# Altium PCB T1_MODIFYV1_0527.PCBDOC (part 6 of 6)
Units mm, origin at the board's own origin, x right, y up, seen from the top; angles counter-clockwise.
Board outline 1320.8 x 844.04 mm, 2 copper layers (Top Layer, Bottom Layer); 219 components, 215 nets, 1393 pads, 492 vias.
Unrouted connection lines stored in the file: 60.
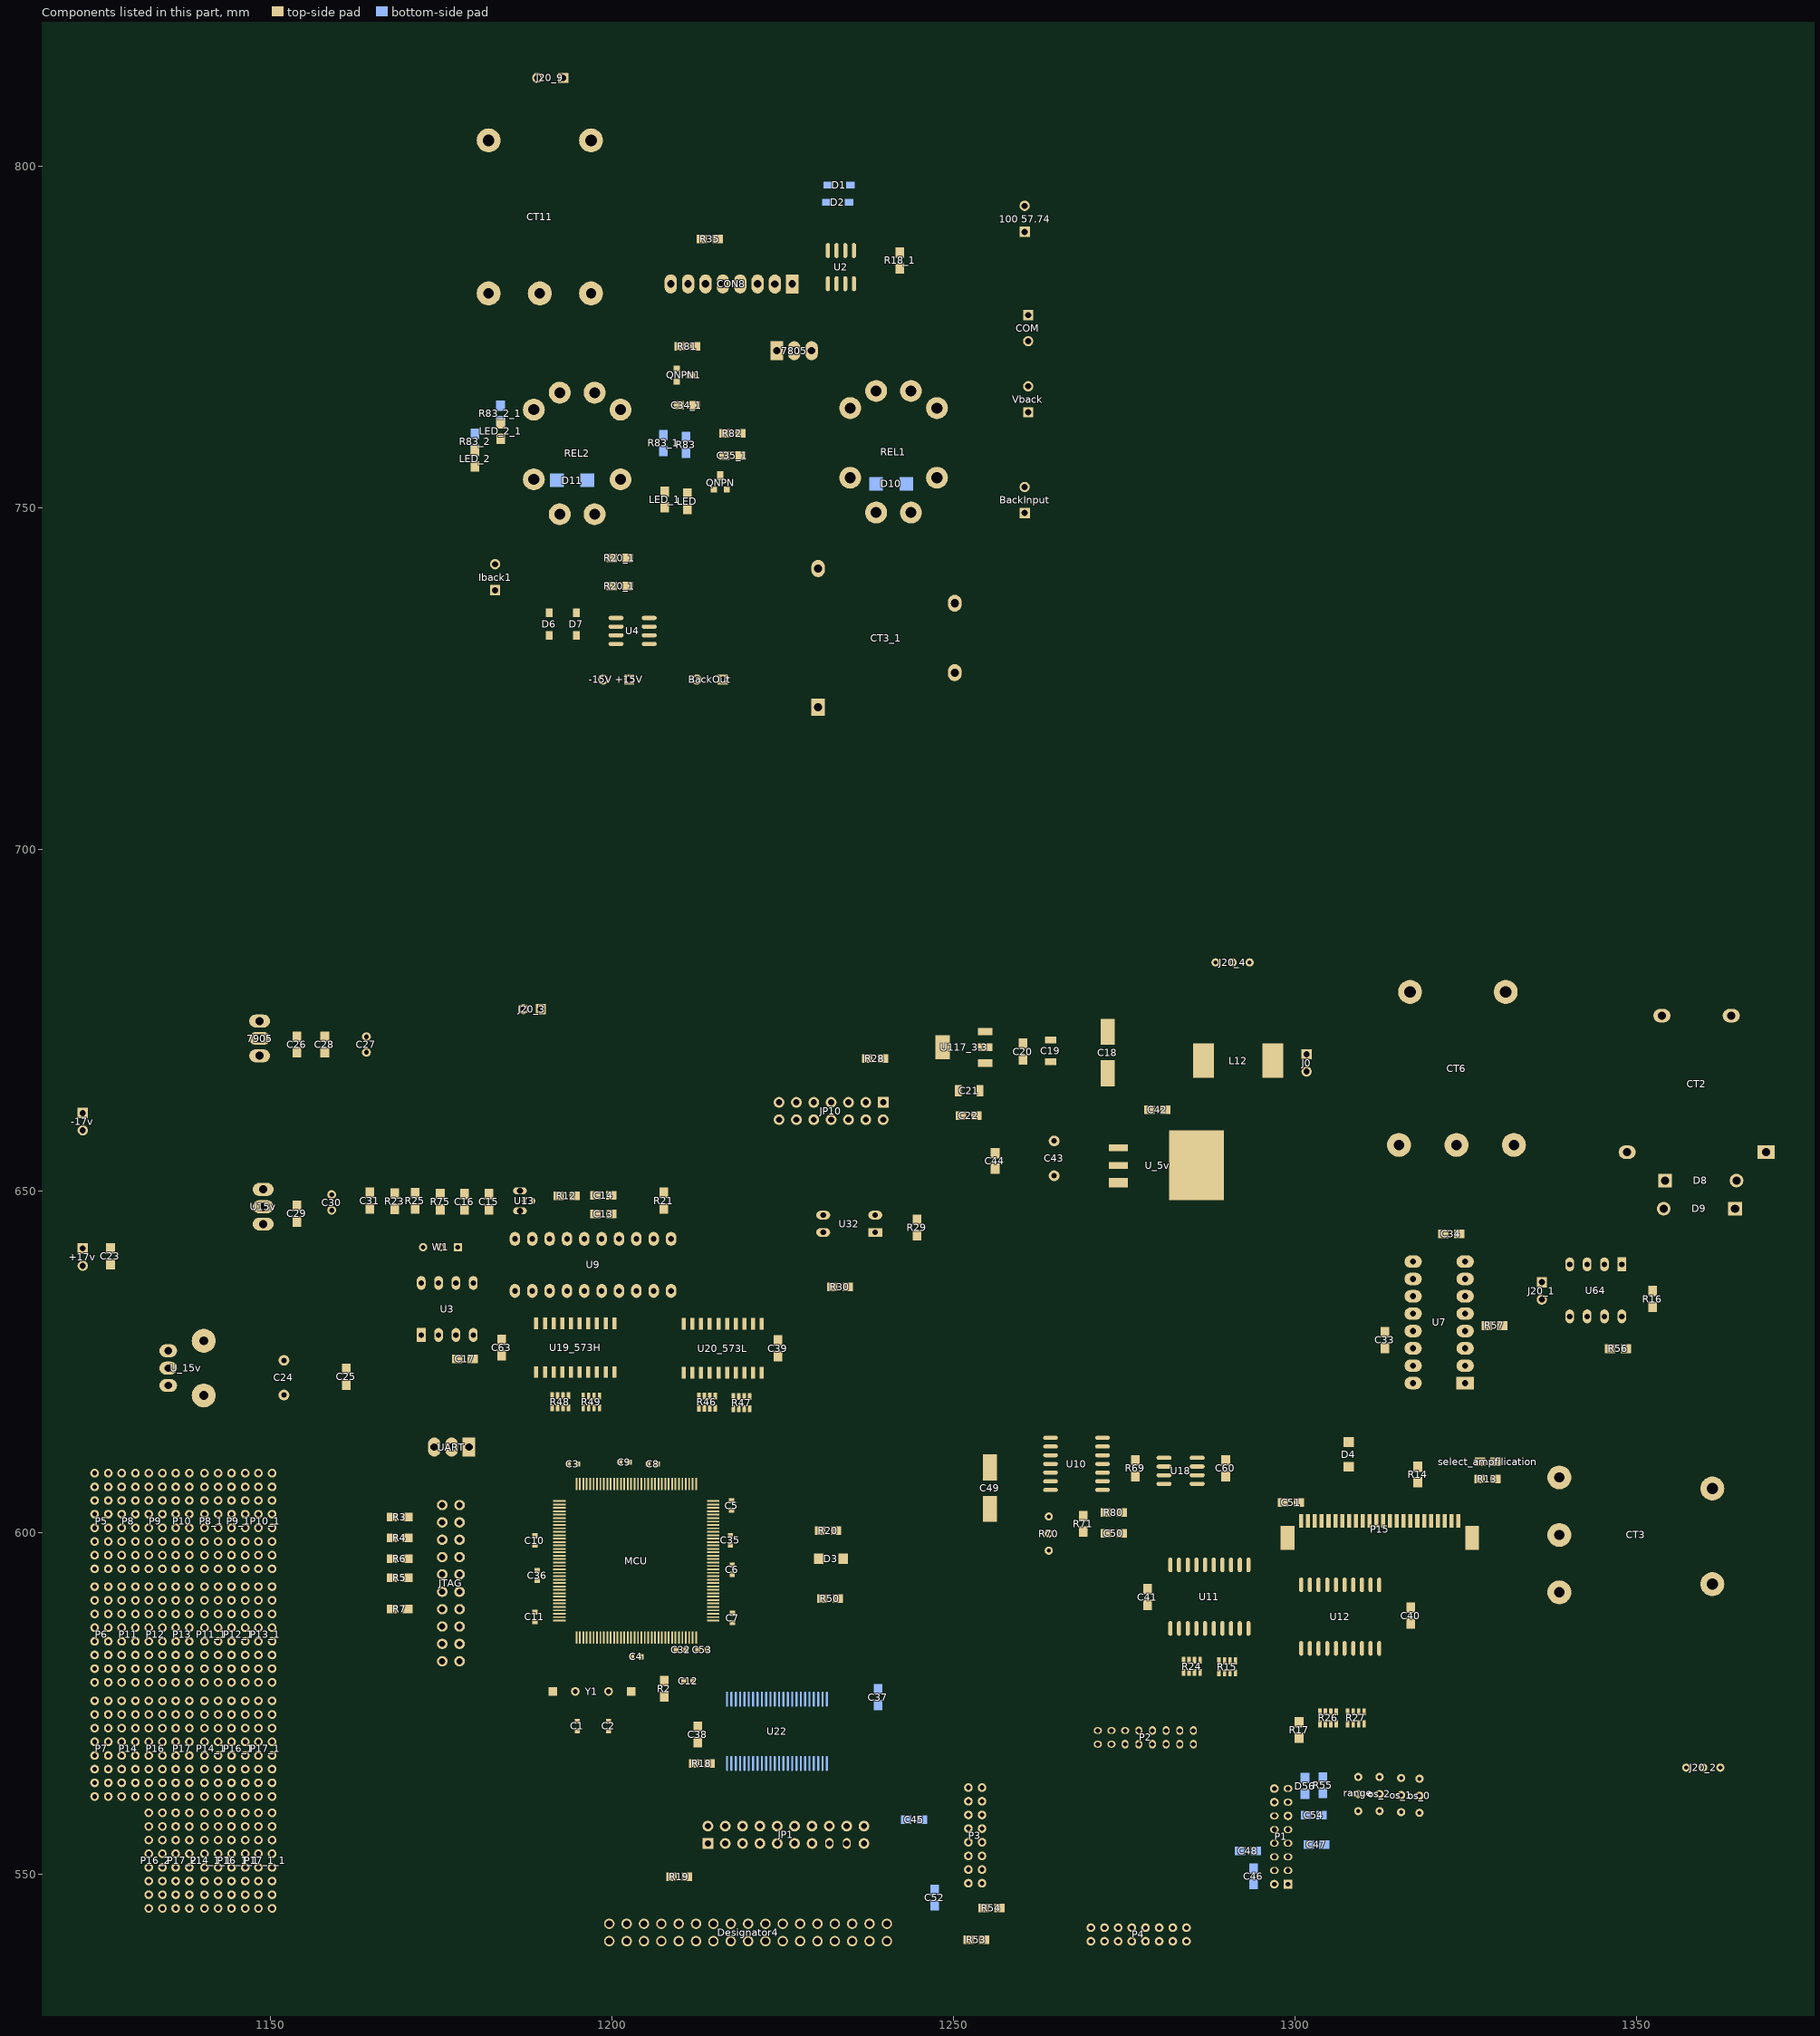
[diagram p6: the components of this part, seen from the top]

## Via types
v1: diameter 0.5, hole 0.3, Top Layer to Bottom Layer, 470 vias
v2: diameter 0.8, hole 0.5, Top Layer to Bottom Layer, 12 vias
v3: diameter 3, hole 1.5, Top Layer to Bottom Layer, 4 vias
v4: diameter 3, hole 3, Top Layer to Bottom Layer, 4 vias
v5: diameter 1, hole 0.7, Top Layer to Bottom Layer, 2 vias

## Nets (pads, with @x,y where several pads share a name; then routed paths per layer and width w, separated by ;. In a path a pad name is that pad's centre, name@x,y a point inside that pad or via, vN(x,y) a via of type N, cw(c..) or ccw(c..) an arc to the next point about the centre after c; other vN are vias at no path point) (continued)
copper on no net: | length 4902.3
  Top Layer w0.2: v1@1187.729,602.132 1189.533,602.132 1191.057,603.656 1191.641,603.656 ; v1(1187.806,601.066) 1187.907,601.167 1189.38,601.167 1191.336,603.123 ; 1188.292,754.154 1197.032,754.154 1205.812,762.934 1210.552,762.934 1210.932,763.314 1210.932,769.174 ; v1@1195.807,610.884 1195.807,609.498 1195.807,609.397 1196.137,609.067 1196.772,608.432 1196.772,608 ; v1(1196.721,610.692) 1196.797,610.489 1196.797,609.016 1197.229,608.584 1197.229,607.822 ; 1198.753,607.314 1198.753,609.981 1198.88,610.108 v1(1198.88,611.429) ; 1199.312,607.873 v1@1199.312,608.863 ; 1199.711,732.665 1199.762,732.665 ; v1@1199.769,605.409 1199.769,606.45 ; 1200.252,605.358 v1(1200.277,604.545) 1200.277,605.333 1200.277,606.476 ; 1201.487,731.264 1202.112,731.264 1202.362,731.514 1202.362,735.039 1201.207,736.194 1187.292,736.194 1186.862,735.764 1186.862,720.639 1188.962,718.539 1233.012,718.539 1233.287,718.814 1233.562,719.089 1233.562,724.364 1233.312,724.614 1226.912,724.614 ; v1(1205.763,578.409) 1205.763,583.895 ; v1(1206.271,577.672) 1206.271,584.124 ; 1210.288,584.66 cw(c1210.767,584.383) 1210.767,584.937 1210.285,584.937 cw(c1210.285,584.421) 1210.741,584.661 ; 1212.799,585.724 1213.815,584.708 ; 1215.263,601.675 1215.796,601.675 1216.558,601.675 v1@1216.762,601.472 ; 1215.517,601.116 1215.873,601.116 1216.177,600.812 v1(1217.066,600.786) ; 1215.517,602.183 v1@1217.447,602.183 ; 1215.542,602.615 1216.228,602.615 v1(1218.311,602.666) ; 1217.492,762.434 1217.612,762.314 1217.612,758.814 1218.437,757.989 ; v1(1239.291,600.507) v1(1243.33,596.468) ; v1(1240.003,601.167) v1(1243.914,597.332) ; v1(1240.815,601.751) v1(1245.159,597.256) ; v1(1241.577,602.463) v1(1244.854,598.907) ; v1(1246.251,593.852) 1246.208,589.958 1247.369,588.797 1251.814,588.797 ; v1(1246.708,594.538) 1246.937,594.309 1246.937,590.474 1247.699,589.712 1252.449,589.712 ; v1(1248.318,594.967) 1249.223,594.741 1252.245,591.718 ; v1(1248.943,595.681) 1249.096,595.478 1259.878,584.695 ; 1257.712,795.589 1261.637,795.589 ; 1257.737,795.589 1257.937,795.589 ; 1258.037,795.389 1259.512,795.389 1259.937,795.814 1258.187,795.814 ; 1258.937,795.714 1259.462,795.714 1259.487,795.689 1259.562,795.689 1259.462,795.589 1259.337,795.589 1259.212,795.714 1259.287,795.639 1258.737,795.639 1258.587,795.789 1258.537,795.789 1258.537,795.614 1258.412,795.739 1258.412,795.589 1258.637,795.589 1258.712,795.664 1258.712,795.589 1258.837,795.714 1258.837,795.814 1259.062,795.589 1260.287,795.589
  Top Layer w0.254: v1(1157.859,618.82) 1157.859,557.606 1180.77,534.695 1245.845,534.695 v1(1251.814,540.664) ; 1170.508,579.018 1170.508,566.801 1199.312,537.997 1211.936,537.997 1212.164,538.226 1212.164,540.08 ; 1175.92,611.532 cw(c1174.576,610.188) 1176.477,610.188 cw(c1178.378,610.188) 1177.034,611.532 ; 1176.1,611.712 cw(c1175.189,610.801) 1176.477,610.801 cw(c1177.765,610.801) 1176.854,611.712 ; 1176.477,612.572 1176.477,608.889 v1(1178.662,606.704) ; v1(1182.167,618.185) 1182.167,613.969 1183.157,612.978 v1(1199.21,612.978) ; v1(1187.298,611.861) 1187.298,609.727 1188.91,608.114 v1(1188.91,607.987) ; v1(1187.298,614.223) 1187.298,616.179 1189.304,618.185 1191.057,618.185 ; v1@1187.729,602.132 v1(1187.882,602.107) ; v1(1188.415,611.784) 1188.415,610.337 1190.625,608.127 v1(1190.65,608.127) ; v1(1188.415,613.893) 1188.415,615.213 1190.219,617.017 1191.59,617.017 1191.984,617.41 1191.984,618.312 ; v1@1188.824,608.2 cw(c1188.611,607.987) v1@1188.913,607.987 ; v1(1189.533,614.375) 1189.533,615.036 1190.93,616.433 1192.428,616.433 1192.86,616.864 1192.86,618.236 1192.784,618.312 ; 1190.59,618.185 cw(c1190.59,617.468) 1191.097,617.975 ; 1191.438,603.148 1191.59,603.148 ; 1191.819,562.839 1191.819,553.517 1192.251,553.085 1192.276,553.085 1202.258,543.103 1202.258,543.027 ; 1191.897,617.975 cw(c1191.687,617.765) 1191.984,617.765 cw(c1192.281,617.765) 1192.071,617.975 ; 1192.682,562.635 1192.682,555.32 1200.023,547.98 1200.099,547.98 1203.401,544.678 1203.401,541.782 1202.106,540.487 1202.106,540.258 ; 1192.697,617.975 cw(c1192.302,617.581) 1192.86,617.581 ; v1(1197.432,611.2) 1197.432,609.422 1197.762,609.092 1197.762,607.746 ; 1198.27,607.695 v1(1198.27,610.591) ; 1200.698,544.663 cw(c1198.834,542.798) 1201.471,542.798 ; 1201.132,544.229 cw(c1199.701,542.798) 1201.725,542.798 ; 1201.566,543.795 cw(c1200.568,542.798) 1201.979,542.798 ; 1201.802,543.559 ccw(c1202.106,543.862) 1202.106,543.433 ; 1202.106,540.893 ccw(c1202.106,541.874) 1202.8,541.18 ; 1202.487,540.258 cw(c1203.959,540.258) 1202.918,541.299 ; 1202.741,540.258 cw(c1204.826,540.258) 1203.351,541.732 ; 1202.741,607.543 1202.741,608.228 1203.325,608.813 1204.265,609.752 v1(1204.265,611.175) ; 1203.274,606.45 1203.274,603.529 1204.316,602.488 v1(1209.396,602.488) ; 1204.227,623.913 1204.824,624.51 v1(1208.481,624.51) ; v1(1204.265,616.839) 1204.265,623.875 ; 1206.737,543.247 ccw(c1205.653,544.331) 1207.186,544.331 ccw(c1208.719,544.331) 1207.635,543.247 ; 1206.841,548.498 cw(c1208.532,546.807) 1208.532,549.199 ; 1206.916,543.067 ccw(c1206.266,543.718) 1207.186,543.718 ccw(c1208.106,543.718) 1207.455,543.067 ; 1207.186,542.798 1207.186,545.846 1210.818,549.478 1210.793,549.478 ; 1207.275,548.932 cw(c1208.532,547.674) 1208.532,549.453 ; 1207.541,540.131 1206.703,540.131 1205.941,540.893 1205.941,547.599 1207.846,549.504 ; 1207.605,549.262 cw(c1207.938,548.93) 1208.223,549.303 ; 1207.708,549.366 cw(c1208.532,548.542) 1208.532,549.707 ; 1207.81,549.467 cw(c1208.115,549.162) 1208.378,549.505 ; 1208.155,549.366 ccw(c1207.846,549.088) 1207.846,549.504 ; 1208.735,549.504 1207.846,549.504 ; 1209.383,583.095 1209.751,583.463 ; 1209.626,582.956 cw(c1210.109,583.105) 1209.751,583.463 ; 1209.751,584.784 1209.751,583.463 ; 1209.789,548.449 ccw(c1208.532,549.707) 1210.31,549.707 ; 1210.223,548.883 ccw(c1209.399,549.707) 1210.564,549.707 ; 1210.259,583.87 1210.259,583.387 1210.767,582.879 1212.19,582.879 1212.217,582.906 1212.507,582.906 ; 1210.341,549.001 cw(c1210.818,548.524) 1210.818,549.199 ; 1210.513,582.879 ccw(c1209.9,582.879) 1210.334,583.313 ccw(c1210.767,583.746) 1210.767,583.133 ; 1210.947,582.7 cw(c1211.38,582.266) 1211.38,582.879 cw(c1211.38,583.492) 1210.947,583.059 ; 1211.817,539.809 cw(c1210.978,538.97) 1212.164,538.97 ; 1211.829,582.879 ccw(c1211.829,583.585) 1212.327,583.086 ; 1211.959,582.879 cw(c1211.959,582.358) 1212.327,582.727 ; 1212.164,538.48 cw(c1214.044,538.48) 1212.715,539.809 ; 1212.164,539.093 cw(c1213.431,539.093) 1212.535,539.989 ; 1213.712,583.084 ccw(c1213.462,583.334) 1213.815,583.334 ; 1213.815,583.209 1213.815,584.708 ; 1213.815,583.702 ccw(c1214.689,583.702) 1214.071,583.084 ; v1(1220.673,611.48) 1232.408,611.48 1241.171,620.243 v1(1265.631,620.243) ; 1230.884,643.992 1230.884,637.337 1232.205,636.016 ; v1(1231.9,632.358) 1232.408,632.866 1232.408,635.965 ; 1234.415,636.143 1251.255,636.143 ; 1238.504,643.992 1238.733,643.763 1244.371,643.763 ; v1(1245.997,633.679) v1(1261.923,633.679) ; 1250.438,539.289 cw(c1252.042,537.684) 1252.042,539.953 ; 1250.871,539.722 cw(c1252.042,538.552) 1252.042,540.207 ; 1251.305,540.156 cw(c1252.042,539.419) 1252.042,540.461 ; v1(1286.231,625.018) 1291.006,625.018 1303.934,612.089 v1(1303.934,608.762) ; v1(1297.534,620.243) 1297.584,620.243 1305.23,612.597 ; 1301.547,666.411 1301.547,623.443 1308.202,616.788 1308.202,613.359 ; 1305.23,612.673 1305.23,612.597 ; 1318.489,609.702 1306.119,609.702 1305.23,610.591 1305.23,612.597
  Top Layer w0.3: 1180.389,789.364 1212.737,789.364 1212.987,789.114 ; 1180.462,780.814 1180.462,784.664 ; v1(1183.615,765.099) 1183.615,771.804 v1(1187.374,775.564) ; v1(1196.137,745.236) 1196.137,747.846 1197.362,749.071 ; 1198.692,724.739 1198.692,729.044 1199.912,730.264 ; 1201.392,754.314 1201.392,755.8 1207.326,761.734 1211.892,761.734 1212.492,762.334 1212.492,764.914 ; v1(1201.471,746.1) 1201.471,754.235 ; 1202.532,738.594 1207.332,738.594 1207.972,737.954 1207.972,731.754 1207.613,731.395 1205.405,731.395 ; 1204.692,724.214 1203.192,725.714 1203.192,732.314 1203.572,732.694 1205.052,732.694 ; 1209.457,764.799 1209.457,768.542 ; 1209.572,770.562 1209.572,773.634 ; 1212.492,762.534 1217.392,762.534 1217.492,762.434 ; 1214.854,752.731 1213.67,752.731 1213.137,753.264 1213.137,760.689 1213.587,761.139 1216.037,761.139 ; 1215.426,789.434 1215.517,789.434 1216.188,788.763 1216.188,782.83 ; 1215.872,754.974 1215.956,754.89 1234.74,754.89 ; 1218.337,757.734 v1(1241.092,757.734) ; 1218.728,760.986 v1(1218.728,773.93) ; v1(1220.699,765.15) 1228.852,765.15 1229.436,765.734 1229.436,772.795 ; 1221.833,790.335 1230.415,790.335 1230.429,790.321 1231.24,790.321 1231.57,789.991 1231.57,788.264 ; 1223.637,784.682 1223.637,785.004 1224.153,785.52 1233.856,785.52 1234.135,785.241 1234.135,783.26 ; 1231.925,779.464 1232.168,779.464 1232.84,780.136 1232.84,782.867 ; 1232.832,787.459 1232.832,789.432 ; 1232.84,780.898 1241.984,780.898 1242.314,781.228 1242.314,785.165 ; 1233.562,751.764 1242.822,751.764 1243.912,752.854 1243.912,761.562 1247.44,765.09 ; 1234.11,787.717 1234.11,793.013 1234.11,793.166 1234.567,793.623 ; 1234.11,791.362 1241.374,791.362 1242.096,790.641 1242.096,787.402 ; 1236.912,746.814 1236.912,747.174
  Top Layer w0.5: 1175.817,756.031 1179.728,756.031 ; v2(1187.137,744.398) 1224.621,744.398 v2(1224.887,744.664) ; 1187.812,764.934 1187.812,770.154 1194.852,777.194 1253.572,777.194 1254.172,777.794 1254.172,791.434 1254.162,791.374 1254.162,794.714 1255.037,795.589 1258.152,795.589 ; 1188.116,770.349 1188.116,769.809 ; 1188.272,765.374 1188.272,769.654 1188.116,769.809 ; 1190.788,731.395 1190.788,721.913 1191.487,721.214 1225.932,721.214 1225.952,721.234 1225.892,721.234 1227.212,722.554 1227.212,740.014 ; 1190.788,734.697 1189.175,734.697 1188.312,733.834 1188.312,721.114 1189.812,719.614 1224.892,719.614 ; 1192.052,767.014 1192.052,767.374 1200.332,775.654 1254.912,775.654 1255.912,776.654 1255.912,787.634 1257.031,788.753 1260.351,788.753 1260.512,788.914 ; 1192.132,768.174 1192.512,768.174 1200.112,775.774 1200.232,775.654 1205.112,775.654 ; 1193.532,731.395 1193.553,731.374 1199.672,731.374 ; 1194.212,734.697 1196.529,734.697 1198.561,732.665 1200.555,732.665 ; 1195.292,777.194 1188.116,770.018 1188.116,769.809 ; 1196.992,767.014 1196.992,764.834 1196.992,762.514 1195.792,761.314 1188.972,761.314 1179.912,752.254 1179.912,739.094 1180.592,738.414 1200.192,738.414 ; 1200.192,742.914 1199.852,742.574 1183.372,742.574 1182.552,743.394 1182.552,752.074 1190.592,760.114 1199.732,760.114 1200.912,761.294 1200.912,765.034 ; 1206.752,738.594 1206.752,741.874 1207.772,742.894 1226.484,742.894 1227.012,743.421 1227.012,745.214 1231.652,749.854 1233.562,751.764 ; 1207.541,752.881 v1(1207.541,758.139) ; 1207.694,749.757 1207.694,748.614 1208.354,747.954 1218.336,747.954 1219.632,749.249 v1(1219.632,751.713) ; 1210.894,750.113 1211.25,749.757 1216.228,749.757 1216.887,750.416 v1(1216.887,752.414) ; 1210.894,752.627 v1(1210.894,757.885) ; 1211.212,782.639 1211.212,779.139 v1(1212.212,778.139) ; 1213.512,782.514 1213.512,779.389 1214.571,778.33 v1(1218.728,778.33) v1@1218.671,778.33 ; 1218.728,782.83 1218.728,780.498 1219.762,779.464 1231.925,779.464 ; 1221.287,783.164 1221.287,789.789 1221.833,790.335 ; 1223.637,784.835 1223.637,782.981 1223.808,782.81 ; 1224.712,719.614 1228.612,719.614 1229.852,720.854 ; 1225.652,721.414 1226.912,722.674 ; 1226.812,740.014 1226.812,740.694 1227.292,741.174 1230.145,741.174 ; 1226.912,723.214 1226.912,722.674 ; 1230.092,740.814 1227.452,740.814 1227.212,740.574 1227.212,740.014 ; v1(1231.798,794.588) 1232.832,793.555 1232.832,789.102 ; v1@1236.878,641.071 1238.885,639.064 v1(1253.592,639.064) ; 1242.096,784.658 1242.096,785.116 ; 1243.727,767.184 1261.952,767.184 ; 1244.252,767.534 1261.632,767.534 1261.952,767.214 ; 1255.032,775.954 1255.292,776.214 1255.912,776.834 ; 1260.392,767.934 1244.252,767.934 1260.632,767.934 ; v1(1305.103,639.267) 1305.103,653.415 1308.202,656.514 1315.669,656.514 ; 1226.912,722.674 1226.912,726.714 1226.912,739.714 1227.212,740.014
  Top Layer w1: 1190.788,731.395 1195.033,731.395 ; 1190.788,734.697 1194.6,734.697 ; 1197.412,766.174 1197.412,767.082
  Bottom Layer w0.2: 1184.123,745.795 1201.166,745.795 ; 1185.215,615.036 1191.844,615.036 v1@1195.819,611.06 ; 1185.926,602.107 v1(1187.882,602.107) ; v2@1187.137,744.296 1187.475,744.634 ; 1188.312,753.839 1191.737,753.839 ; 1192.251,615.696 1192.606,615.696 1196.721,611.581 v1(1196.721,610.692) ; 1194.537,577.266 1196.391,575.412 1201.09,575.412 ; 1194.562,758.639 1194.762,758.639 ; 1197.087,753.739 1200.662,753.739 1201.145,754.222 ; v1(1198.88,611.429) 1199.007,611.429 1199.21,611.632 v1(1199.21,612.978) ; 1199.515,571.221 1199.515,552.577 1207.186,544.906 1207.186,542.798 1209.726,540.258 1209.726,539.445 1210.31,538.861 1214.78,538.861 1215.009,538.956 1215.009,540.08 ; 1200.861,575.412 1204.671,575.412 1206.271,577.012 v1(1206.271,577.672) ; 1204.873,577.469 1205.763,578.36 v1(1205.763,578.409) ; 1206.718,543.266 ccw(c1205.588,544.396) 1207.186,544.396 ccw(c1208.784,544.396) 1207.654,543.266 ; 1206.859,543.125 ccw(c1206.07,543.913) 1207.186,543.913 ccw(c1208.301,543.913) 1207.512,543.125 ; 1207.186,542.136 cw(c1207.186,540.538) 1208.316,541.668 cw(c1209.446,542.798) 1207.848,542.798 ; 1207.186,542.336 cw(c1207.186,541.221) 1207.974,542.009 cw(c1208.763,542.798) 1207.648,542.798 ; 1209.064,540.258 ccw(c1207.466,540.258) 1208.596,541.388 ccw(c1209.726,542.518) 1209.726,540.92 ; 1209.264,540.258 ccw(c1208.148,540.258) 1208.937,541.047 ccw(c1209.726,541.835) 1209.726,540.72 ; 1209.726,542.136 cw(c1209.726,540.415) 1210.943,541.632 ; 1209.726,542.336 cw(c1209.726,541.098) 1210.601,541.973 ; 1210.188,542.798 ccw(c1211.181,542.798) 1210.479,542.096 ; 1210.388,542.798 ccw(c1211.863,542.798) 1210.82,541.755 ; 1211.1,541.475 cw(c1209.883,540.258) 1211.604,540.258 ; 1211.222,541.352 ccw(c1212.266,542.396) 1212.266,540.92 ; 1211.441,541.133 cw(c1210.566,540.258) 1211.804,540.258 ; 1211.564,541.011 ccw(c1212.266,541.713) 1212.266,540.72 ; 1212.088,540.487 1209.777,542.798 ; 1214.543,539.651 cw(c1214.234,538.94) 1215.009,538.94 ; 1214.622,539.834 cw(c1214.367,539.245) 1215.009,539.245 ; 1215.009,539.15 cw(c1215.913,539.15) 1215.274,539.79 ; v1(1216.584,601.472) 1218.209,601.472 1218.514,601.167 v1(1240.003,601.167) ; v1(1217.066,600.786) 1217.346,600.507 v1(1239.291,600.507) ; 1217.312,724.864 1218.649,726.201 1218.649,726.301 1218.362,726.014 ; 1217.437,724.989 1217.437,725.089 1219.062,726.714 ; v1@1217.447,601.929 1218.292,601.929 1218.914,601.929 1219.225,601.929 1219.403,601.751 v1@1241.044,601.751 ; v1(1218.311,602.666) v1(1241.577,602.463) ; 1218.382,723.764 1218.562,723.944 ; 1218.587,726.239 1218.362,726.014 ; 1219.062,725.844 1219.062,726.714 ; v2@1229.867,744.634 v2(1230.062,744.439) 1230.062,741.639 ; 1234.787,753.489 1238.562,753.489 1238.737,753.664 ; 1243.137,753.664 1247.012,753.664 1247.162,753.814 ; v1(1243.33,596.468) v1(1246.251,593.852) ; v1(1243.914,597.332) v1(1246.708,594.538) ; v1(1244.854,598.907) 1247.496,596.011 v1(1248.943,595.681) ; v1(1245.159,597.256) 1245.207,597.386 1247.394,595.198 v1(1248.318,594.967) ; 1293.089,551.866 1293.089,556.819 ; 1209.777,542.798 1209.726,542.798 1209.777,542.798 ; 1218.362,726.014 1219.062,726.714 ; 1219.062,726.714 1219.307,726.714 1219.062,726.714
  Bottom Layer w0.254: 1123.798,608.559 1126.025,608.559 ; 1124.22,594.754 1126.22,594.754 ; 1124.22,602.754 1126.097,602.754 ; 1124.22,604.754 1126.383,604.754 ; 1124.22,606.754 1126.466,606.754 ; 1124.306,600.558 1126.719,600.558 ; 1124.458,596.849 1126.124,596.849 ; 1124.458,598.576 1126.043,598.576 ; v1(1157.859,618.82) 1157.859,619.633 1162.406,624.18 1188.593,624.18 1192.682,628.269 1192.682,628.929 v1(1192.682,630.701) ; 1173.937,612.572 1173.937,611.937 1174.521,611.353 ; 1174.598,611.276 1176.274,609.6 ; 1175.69,610.184 1176.274,609.6 ; 1179.22,612.013 1181.989,612.013 1185.469,608.533 1185.469,602.564 1185.926,602.107 ; 1179.394,611.712 cw(c1180.121,610.985) 1180.121,612.013 ; 1179.394,612.466 ccw(c1180.489,613.561) 1180.489,612.013 ; 1179.574,611.532 cw(c1180.734,610.372) 1180.734,612.013 ; 1179.574,612.646 ccw(c1181.102,614.174) 1181.102,612.013 ; v1@1182.167,618.236 1159.713,618.236 1158.215,616.737 1158.215,558.19 1181.506,534.899 1239.952,534.899 1240.485,534.899 1240.536,534.924 1241.704,536.092 1241.781,536.194 1241.781,541.477 1240.206,543.052 1240.18,543.052 ; 1185.215,615.036 1165.352,615.036 1162.253,611.937 1162.253,560.299 1184.58,537.972 1234.897,537.972 1236.294,539.369 1236.294,541.172 1235.304,542.163 1235.304,542.976 ; 1185.316,615.696 1192.606,615.696 ; 1185.418,615.696 1163.98,615.696 1161.39,613.105 1161.39,559.511 1183.691,537.21 1236.523,537.21 1237.742,538.429 1237.742,540.512 ; 1185.621,616.483 1193.47,616.483 1197.432,612.521 v1(1197.432,611.2) ; 1185.875,616.483 1162.558,616.483 1160.424,614.35 1160.424,559.232 1183.361,536.296 1238.072,536.296 1238.834,537.058 1238.834,541.376 1237.971,542.239 1237.971,542.747 ; v1(1187.298,611.861) v1(1187.298,614.223) ; v1(1187.806,601.066) 1186.078,601.066 1185.723,601.421 1184.427,602.717 1184.427,607.543 1182.37,609.6 1176.274,609.6 ; v1(1188.415,611.784) v1(1188.415,613.893) ; v1(1188.91,607.987) 1192.006,604.892 1192.031,604.892 1192.663,604.26 1199.942,604.26 v1(1200.277,604.545) ; v1(1189.533,614.375) 1189.533,610.616 1190.879,609.27 1195.578,609.27 1195.934,608.914 1199.058,608.914 1199.083,608.889 v1(1199.337,608.889) ; v1(1190.142,630.701) 1190.142,632.765 1191.057,633.679 v1(1245.997,633.679) ; 1190.219,626.974 1191.311,628.066 ; 1190.219,626.999 1161.771,626.999 1156.716,621.944 1156.716,558.013 1180.567,534.162 1290.041,534.162 1290.879,535 1290.879,550.647 1291.133,550.901 1293.647,550.901 ; v1(1190.65,608.127) 1193.876,604.901 1199.261,604.901 v1(1199.744,605.384) ; 1191.311,628.091 1191.311,630.599 v1(1191.412,630.701) ; 1191.311,630.461 cw(c1191.653,630.461) v1@1191.411,630.702 ; v1(1198.27,610.591) 1198.27,614.223 1195.146,617.347 1186.256,617.347 1161.313,617.347 1159.434,615.467 1159.434,558.571 1182.395,535.61 1239.215,535.61 1240.206,536.6 1240.206,540.258 ; v1(1204.265,611.175) v1@1204.265,616.89 ; 1206.398,548.386 1211.986,542.798 1212.266,542.798 ; v1(1208.481,624.51) 1228.039,624.51 1232.205,628.675 1232.205,632.054 v1(1231.9,632.358) ; v1(1209.396,602.488) 1209.472,602.488 v1(1218.463,611.48) v1(1220.673,611.48) ; 1210.705,544.08 ccw(c1212.266,545.641) 1212.266,543.433 ; 1211.138,543.646 ccw(c1212.266,544.773) 1212.266,543.179 ; 1211.379,543.405 cw(c1210.772,542.798) 1211.631,542.798 ; 1211.572,543.212 ccw(c1212.266,543.906) 1212.266,542.925 ; 1224.255,660.806 1224.255,662.806 ; 1226.947,660.864 1226.947,662.457 ; 1226.962,660.494 1226.962,647.304 1227.734,646.532 1230.884,646.532 ; 1226.987,662.686 1226.987,669.62 ; 1229.436,660.863 1229.436,662.559 ; 1229.462,660.984 1229.462,662.33 ; 1230.224,669.696 1230.224,676.326 1232.586,678.688 1292.174,678.688 1293.927,676.935 1310.488,676.935 1330.223,657.2 1332.179,657.2 ; 1234.61,660.73 1234.61,662.73 ; 1235.126,542.163 cw(c1235.126,541.734) 1235.429,542.037 ; 1235.248,542.765 ccw(c1235.989,542.563) 1235.446,542.02 ; 1235.493,542.698 ccw(c1236.476,542.431) 1235.756,541.711 ; 1235.739,542.631 ccw(c1236.963,542.298) 1236.066,541.401 ; 1237.217,539.809 cw(c1235.949,538.541) 1237.742,538.541 ; 1237.396,539.989 cw(c1236.562,539.154) 1237.742,539.154 ; 1237.666,542.163 cw(c1237.666,541.243) 1238.316,541.894 ; 1237.666,542.798 1237.666,543.306 1239.545,545.186 v1(1254.227,545.211) ; 1237.742,538.909 cw(c1239.015,538.909) 1238.115,539.809 ; 1237.793,542.798 cw(c1239.326,542.798) 1238.242,543.882 ; 1238.044,542.748 ccw(c1239.087,542.611) 1238.343,541.867 ; 1238.047,542.798 cw(c1240.193,542.798) 1238.675,544.316 ; 1238.295,542.715 ccw(c1239.731,542.527) 1238.707,541.503 ; 1238.301,542.798 cw(c1241.06,542.798) 1239.109,544.749 ; 1238.733,646.43 1239.825,647.522 1239.825,661.518 ; 1239.723,660.933 1239.723,662.584 ; 1239.757,539.809 cw(c1238.673,538.725) 1240.206,538.725 cw(c1241.739,538.725) 1240.655,539.809 ; 1239.936,539.989 cw(c1239.286,539.338) 1240.206,539.338 cw(c1241.126,539.338) 1240.475,539.989 ; 1240.206,542.163 cw(c1240.206,540.017) 1241.723,541.534 ; 1240.206,542.417 cw(c1240.206,540.884) 1241.29,541.968 ; 1240.841,542.798 ccw(c1241.761,542.798) 1241.11,542.148 ; 1245.535,545.186 ccw(c1245.535,547.019) 1246.832,545.723 ; 1246.148,545.186 ccw(c1246.148,546.406) 1247.011,545.543 ; 1246.394,545.186 cw(c1246.394,544.566) 1246.832,545.004 ; 1247.37,545.543 ccw(c1248.233,546.406) 1248.233,545.186 ; 1247.55,545.004 cw(c1247.988,544.566) 1247.988,545.186 ; 1247.55,545.723 ccw(c1248.846,547.019) 1248.846,545.186 ; v1(1251.814,540.664) 1251.814,541.985 1252.728,542.9 1258.57,542.9 1266.952,551.282 1274.699,551.282 ; v1(1256.792,544.83) 1264.92,552.933 1275.41,552.933 ; v1(1261.923,633.679) 1277.569,633.679 v1(1286.231,625.018) ; v1(1265.631,620.243) 1271.27,620.243 v1(1297.534,620.243) ; 1288.317,683.514 1288.317,683.028 1290.404,685.114 1329.995,685.114 1330.801,684.308 1330.801,681.324 ; 1293.063,551.891 cw(c1292.317,551.145) 1293.369,551.066 ; 1293.089,551.866 1293.851,551.104 ; 1293.089,556.819 1294.359,558.089 1296.302,558.089 ; 1293.096,551.859 ccw(c1293.876,552.639) 1293.876,551.536 ; 1293.517,550.541 ccw(c1292.65,549.674) 1292.65,550.901 ccw(c1292.65,552.127) 1293.517,551.26 ; 1293.724,683.463 1312.367,683.463 1317.193,678.637 ; 1301.166,561.924 1303.706,561.924 1303.858,561.772 1303.858,561.492 1301.242,558.876 ; 1301.191,564.617 1309.065,564.617 1309.395,564.286 ; 1301.42,564.236 cw(c1302.34,563.316) 1302.34,564.617 ; 1301.599,562.129 ccw(c1302.094,562.624) 1302.094,561.924 ; 1301.599,564.056 cw(c1302.953,562.703) 1302.953,564.617 ; 1301.779,561.59 cw(c1302.585,560.784) 1302.585,561.924 ; 1301.779,562.309 ccw(c1302.708,563.237) 1302.708,561.924 ; 1301.779,563.876 cw(c1303.566,562.089) 1303.566,564.617 ; 1302.11,564.617 cw(c1302.11,562.436) 1303.651,563.978 ; 1302.723,564.617 cw(c1302.723,563.049) 1303.831,564.158 ; 1303.036,560.67 ccw(c1301.908,561.797) 1303.503,561.797 ; 1303.336,564.617 cw(c1303.336,563.663) 1304.011,564.337 cw(c1304.685,563.663) 1304.685,564.617 ; 1303.404,561.038 cw(c1304.011,560.431) 1304.011,561.289 ; 1303.469,561.103 ccw(c1302.775,561.797) 1303.757,561.797 ; 1303.651,561.565 ccw(c1302.784,560.698) 1302.784,561.924 ccw(c1302.784,563.151) 1303.651,562.283 ; 1303.858,558.673 1308.604,558.673 1309.218,559.286 1315.339,559.286 ; 1304.19,564.158 cw(c1305.298,563.049) 1305.298,564.617 ; 1304.37,563.978 cw(c1305.912,562.436) 1305.912,564.617 ; 1307.279,564.617 cw(c1307.279,562.347) 1308.883,563.952 ; 1307.632,561.786 1309.218,561.786 ; 1307.892,564.617 cw(c1307.892,562.961) 1309.063,564.132 ; 1308.505,564.617 cw(c1308.505,563.574) 1309.242,564.311 ; 1309.218,564.286 1315.466,564.286 1315.796,563.956 ; 1309.552,558.952 cw(c1310.36,558.144) 1310.36,559.286 cw(c1310.36,560.428) 1309.552,559.621 ; 1309.552,563.952 cw(c1310.36,563.144) 1310.36,564.286 cw(c1310.36,565.428) 1309.552,564.621 ; 1310.894,561.492 1311.188,561.786 1312.342,561.786 ; 1312.007,558.952 ccw(c1311.2,558.144) 1311.2,559.286 ccw(c1311.2,560.428) 1312.007,559.621 ; 1312.007,563.952 ccw(c1311.2,563.144) 1311.2,564.286 ccw(c1311.2,565.428) 1312.007,564.621 ; 1312.676,558.952 cw(c1313.484,558.144) 1313.484,559.286 cw(c1313.484,560.428) 1312.676,559.621 ; 1312.676,563.952 cw(c1313.484,563.144) 1313.484,564.286 cw(c1313.484,565.428) 1312.676,564.621 ; 1313.866,561.492 1314.007,561.634 1315.491,561.634 ; 1313.982,559.286 cw(c1313.982,557.624) 1315.157,558.8 ; 1313.982,564.286 cw(c1313.982,562.624) 1315.157,563.8 ; 1314.595,559.286 cw(c1314.595,558.237) 1315.337,558.979 ; 1314.595,564.286 cw(c1314.595,563.237) 1315.337,563.979 ; 1314.717,559.286 ccw(c1314.717,559.908) 1315.157,559.468 ; 1314.717,564.286 ccw(c1314.717,564.908) 1315.157,564.468 ; 1315.491,564.134 1318.489,564.134 ; 1315.646,558.979 cw(c1316.563,558.063) 1316.563,559.359 ; 1315.695,559.359 1317.955,559.359 1318.489,558.825 ; 1315.826,558.8 cw(c1317.176,557.449) 1317.176,559.359 ; 1315.826,559.468 ccw(c1316.091,559.733) 1316.091,559.359 ; 1315.826,563.8 cw(c1316.633,562.992) 1316.633,564.134 cw(c1316.633,565.276) 1315.826,564.468 ; 1316.254,559.359 cw(c1316.254,557.103) 1317.849,558.698 ; 1316.867,559.359 cw(c1316.867,557.716) 1318.029,558.878 ; 1316.903,561.532 1318.184,561.532 ; 1317.48,559.359 cw(c1317.48,558.329) 1318.209,559.057
  Bottom Layer w0.3: 1179.906,760.882 1179.906,762.61 1182.319,765.023 1183.64,765.023 1183.869,765.023 ; v1(1183.589,760.044) 1183.589,746.328 1184.123,745.795 ; v1(1187.374,775.564) 1212.212,775.564 v1(1212.212,778.139) ; v1(1196.137,734.697) v1(1196.137,745.236) ; 1201.166,745.795 v1(1201.471,746.1) ; v1(1209.537,765.264) 1216.937,757.864 ; v1(1212.037,765.15) v1(1220.699,765.15) ; v1(1218.728,773.93) v1(1218.728,778.33) ; 1223.681,774.649 1223.681,779.816 1223.681,782.682 1223.808,782.81 ; v1(1241.092,757.734) 1246.552,757.734 1247.412,756.874 1247.412,754.654
  Bottom Layer w0.5: 1183.234,765.048 1183.284,765.048 ; v2(1187.137,736.039) v2@1187.137,744.539 ; 1192.537,749.089 1194.137,750.689 1194.137,757.989 1194.787,758.639 1204.137,758.639 1204.512,759.014 1204.512,767.214 1204.687,767.389 1238.339,767.389 1238.54,767.59 ; 1207.465,760.679 1210.945,760.679 ; v1(1208.583,768.731) 1226.845,768.934 ; v1(1209.437,768.989) 1226.922,768.985 ; 1210.818,760.425 v1(1213.028,760.425) ; v1(1212.212,773.914) 1212.212,775.564 ; v1(1216.887,752.414) 1216.887,757.364 v1(1216.937,757.414) 1216.937,757.864 ; 1217.193,725.414 1244.032,725.414 ; 1217.892,724.971 1243.589,724.971 ; 1218.382,723.994 1243.312,723.994 1244.652,725.334 1244.752,725.334 1244.752,725.574 ; 1219.095,726.174 1242.992,726.174 ; v1(1219.632,751.713) v1(1219.632,757.606) ; v2(1224.887,744.664) v2@1230.062,744.664 ; 1234.402,660.762 1234.402,643.674 v1(1236.802,641.274) ; 1243.032,726.434 1219.355,726.434 1217.712,724.791 1243.409,724.791 1244.492,725.874 1244.772,725.874 ; 1243.911,724.213 1244.632,724.934 1244.832,724.934 ; 1244.032,725.794 1219.012,725.794 1217.552,724.334 1243.092,724.334 1244.032,725.274 1244.032,725.674 1244.312,725.394 1244.312,725.634 1244.552,725.874 ; v1(1253.592,639.064) 1282.878,639.064 1282.903,639.039 1305.204,639.039
  Bottom Layer w1: 1176.477,772.922 1202.179,772.922 1206.37,768.731 1209.287,768.731 ; 1176.912,771.939 1176.912,794.989 1177.587,795.664 1224.937,795.664 1226.348,794.253 1226.348,782.83 ; 1221.062,795.664 1221.062,802.546 1223.679,805.164 1249.569,805.164 1251.712,803.021 1251.712,779.882 1250.044,778.214 1226.566,778.214
  other v1: 1217.447,602.056 1195.918,610.996 1217.784,724.566 1218.717,724.586 1217.752,725.729 1218.689,725.767 1217.625,729.818 1219.327,729.818 1220.8,729.818 1222.375,729.818 1217.574,731.38 1219.175,731.38 1220.749,731.38 1222.375,731.38 1217.574,732.942 1219.276,732.942 1220.749,732.942 1222.324,732.942 1217.524,734.505 1219.124,734.505 1220.699,734.505 1222.324,734.505 1217.447,736.067 1219.073,736.067 1220.699,736.067 1222.324,736.067 1255.372,740.634 1254.592,740.674 1254.632,741.494 1255.412,741.494 1179.906,758.393 1255.432,761.134 1254.592,761.214 1254.552,761.914 1255.392,761.954 1183.488,762.533 1233.043,763.676 1231.189,763.702 1229.563,763.727 1206.487,781.964 1206.487,783.764 1208.037,791.439 1206.812,791.464 1205.612,791.489 1205.662,792.814 1206.787,792.814 1208.037,792.814 1235.151,794.842 1235.278,797.23 1231.976,797.357
  other v2: 1175.737,724.289 1175.737,738.005 1175.737,751.722 1175.737,765.439 1175.887,775.489 1175.887,781.097 1175.887,786.705 1175.887,792.314
  other v3: 1238.107,794.861 1229.107,796.861 1229.107,812.356 1238.107,814.356
  other v4: 1175.162,720.964 1269.162,720.964 1175.162,814.964 1269.162,814.964

## Keep-outs
Top Layer:
  lines w0.5: 1230.062,741.514 1230.062,744.439

## Other copper
Top Layer:
  rectangle: 1229.131,762.838 1235.989,764.464
  rectangle: 1227.607,810.539 1235.786,813.994
  rectangle: 1259.764,773.049 1267.231,774.319
  rectangle net VDD33: 1232.078,599.11 1233.551,599.796
  rectangle net GND_D1: 1339.926,645.185 1354.785,657.174
  rectangle net GND_D1: 1335.862,645.262 1341.806,646.532
  rectangle net VDD_D1: 1274.547,653.237 1282.878,654.126
  rectangle: 1280.49,660.273 1288.415,675.462
  rectangle: 1174.662,723.189 1177.162,795.039
  rectangle: 1210.362,721.339 1211.987,724.164
  rectangle: 1179.952,811.694 1188.032,814.954
  rectangle: 1179.992,800.754 1184.232,813.894
  rectangle: 1227.3,800.954 1232.152,801.602
  rectangle: 1231.632,794.006 1232.317,801.602
  rectangle: 1226.752,793.214 1232.272,801.894
  rectangle: 1234.11,793.309 1235.79,811.555
  rectangle: 1202.012,738.394 1202.932,742.834
  rectangle: 1265.812,728.954 1268.972,779.974
  rectangle: 1257.732,726.414 1269.052,736.854
  rectangle: 1235.252,746.094 1240.292,750.094
  rectangle: 1235.252,744.414 1262.492,746.094
  rectangle: 1258.337,752.189 1268.067,756.389
  region: 1268.828,758.779 1268.828,781.314 1266.612,781.314 1266.612,758.779
  rectangle: 1258.387,777.389 1269.072,782.474
  rectangle: 1229.652,740.374 1255.712,741.934
  rectangle: 1254.332,760.834 1261.072,762.374
  rectangle: 1195.045,778.764 1209.237,784.139
  rectangle: 1208.262,768.164 1210.062,769.29
  rectangle: 1208.262,764.314 1209.587,769.239
  rectangle: 1180.137,779.439 1183.237,789.414
  rectangle: 1204.937,791.189 1208.962,795.864
  rectangle: 1204.937,793.214 1228.037,795.864
  rectangle: 1258.662,744.339 1262.812,749.964
  rectangle: 1195.362,800.239 1217.812,806.539
  rectangle: 1192.787,800.064 1196.012,814.239
Bottom Layer:
  rectangle: 1216.457,729.336 1222.832,750.265
  rectangle: 1217.346,746.658 1230.071,750.214
  rectangle: 1215.314,723.367 1220.8,726.999
  rectangle net VDD33: 1232.052,599.161 1234.567,599.999
  rectangle: 1217.612,723.414 1220.412,726.789
  rectangle: 1174.676,723.114 1177.251,795.327
  rectangle: 1222.792,759.689 1235.952,765.974
  rectangle: 1222.892,747.194 1230.122,765.354
  rectangle: 1242.852,725.854 1245.032,750.174
  rectangle: 1254.292,740.434 1255.632,762.454
  rectangle: 1225.779,768.68 1227.226,783.855
  rectangle: 1204.837,781.714 1209.087,793.164

## Silkscreen, mask and mechanical layers (free items; w line width, h text height)
Top Overlay:
  text "2016.08.02" at 1204.163,815.569 h1.52
  text "ChangeV_I Ver00" at 1204.163,812.825 h1.52
  text "T1_ModifyV1" at 1213.688,679.602 h2
  text "2016.05.27" at 1213.866,675.284 h2
  text "DND" at 1123.188,652.831 h1.52 r90
  text "DND" at 1123.264,632.866 h1.52 r90
  text "RX" at 1168.095,612.064 h1.2
  text "TX" at 1182.522,611.988 h1.2
  text "RS" at 1221.537,586.003 h1.2
  text "TS" at 1216.948,583.328 h1.2
Mechanical 1:
  circle w0.254: c1364.717,548.843 r3.689
  circle w0.254: c1351.193,683.26 r3.084
  circle w0.254: c1358.965,636.93 r3.084
  lines w0.254: 1118.438,687.273 1372.921,687.273 ; 1118.489,687.273 1118.489,533.527 1372.895,533.527 1372.895,687.502

## Text inside footprints (layer, text, board x,y; h text height)
C18: Top Overlay "C" at 1269.771,670.585 h1.2 r270
C49: Top Overlay "C" at 1258.062,606.298 h1.2 r90
D3: Top Overlay "D" at 1232.662,596.976 h1.2 r180